# Altium PCB eBox_relay.PcbDoc
Units mm, origin at the board's own origin, x right, y up, seen from the top; angles counter-clockwise.
Board outline 47 x 90 mm, 2 copper layers (Top Layer, Bottom Layer); 51 components, 34 nets, 131 pads, 8 vias.
Unrouted connection lines stored in the file: 88.
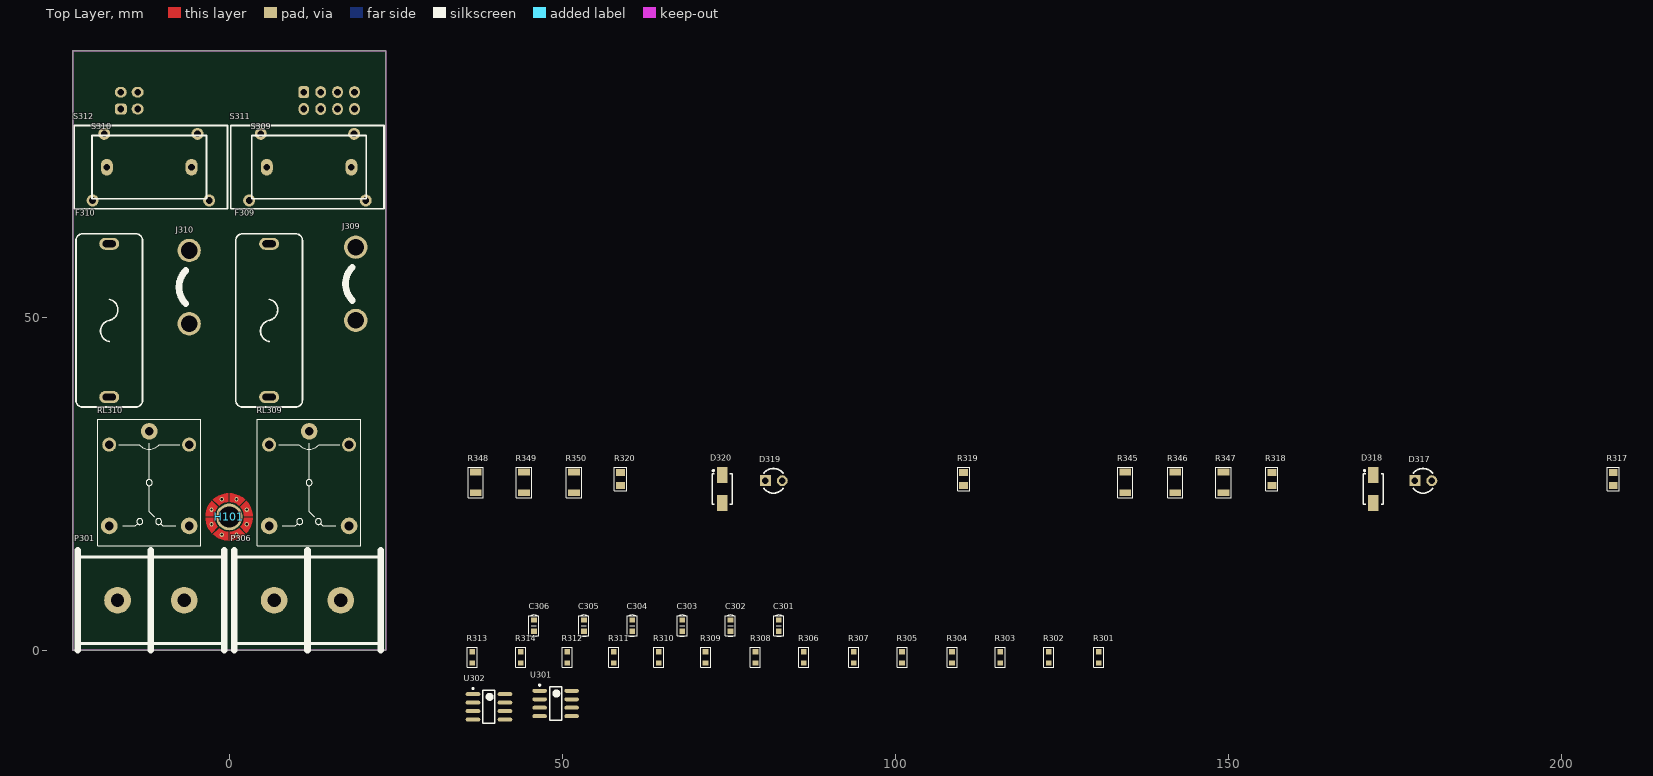
[diagram p0: Top Layer view]
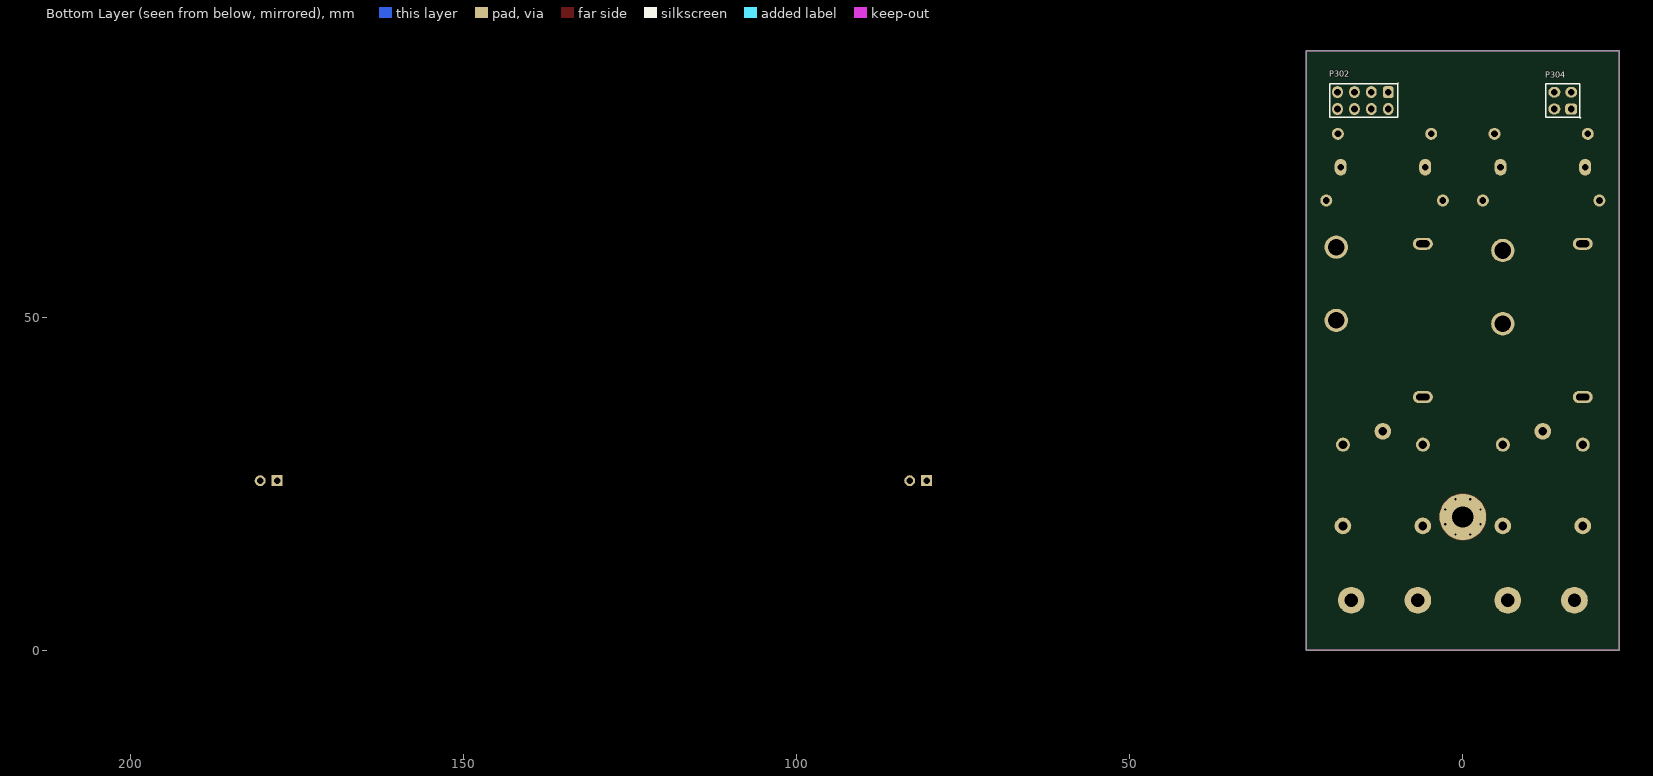
[diagram p1: Bottom Layer view, seen from below]

## Layer stack, top to bottom
Top Solder: solder mask 0.0102, Solder Resist, Dk 3.5
Top Layer: signal copper 0.0356
Dielectric 1: dielectric 0.32, FR-4, Dk 4.8
Bottom Layer: signal copper 0.0356
Bottom Solder: solder mask 0.0102, Solder Resist, Dk 3.5

## Board outline
-23.5,0 23.5,0 23.5,90 -23.5,90

## Design rules (kind name [scope] priority, off if disabled: settings)
Clearance Clearance_3 [InComponent('H*')] p1: gap=0 ignorepadtopadclearanceinfootprint=FALSE
Clearance Clearance_2 [InNet('ACL*') OR InNet('ACN*')] p2: gap=0.35 ignorepadtopadclearanceinfootprint=FALSE except(0: Arc-Hole Track-Hole SMDPad-Hole THPad-Hole Via-Hole Fill-Hole Poly-Hole Region-Hole Text-Hole)
Clearance Clearance_1 [InPolygon] p3: gap=0.5 ignorepadtopadclearanceinfootprint=FALSE except(0: Arc-Hole Track-Hole SMDPad-Hole THPad-Hole Via-Hole Fill-Hole Poly-Hole Region-Hole Text-Hole)
Clearance [All] p4: gap=0.3 ignorepadtopadclearanceinfootprint=FALSE except(0: Arc-Hole Track-Hole SMDPad-Hole THPad-Hole Via-Hole Fill-Hole Poly-Hole Region-Hole Text-Hole)
ComponentClearance ComponentClearance_1 [InComponent('M802') OR  InComponent('P104') OR InComponent('Y202') OR InComponent('C101') OR InComponent('P101') OR InComponent('L101') OR  InComponent('S309') OR InComponent('S310') OR InComponent('H*')] p1: gap=0 collisioncheckmode=3 verticalgap=0 showdistances=FALSE
ComponentClearance [All] p2: gap=0.254 collisioncheckmode=3 verticalgap=0.254 showdistances=FALSE
Height [All] p1: minheight=0 maxheight=30 prefheight=12.7
PolygonConnect PolygonConnect_1 [IsVia] p1: connectstyle=Direct reliefconductorwidth=0.254 reliefentries=4 polygonreliefangle="90 Angle" airgapwidth=0.254
PolygonConnect PolygonConnect_2 [InNet('GND')] p2: connectstyle=Relief reliefconductorwidth=0.3 reliefentries=4 polygonreliefangle="90 Angle" airgapwidth=0.3
PolygonConnect [All] p3: connectstyle=Relief reliefconductorwidth=0.381 reliefentries=4 polygonreliefangle="90 Angle" airgapwidth=0.635
RoutingVias [All] p1: holewidth=0.4 width=0.8 viastyle="Through Hole" minholewidth=0.3 minwidth=0.6 maxholewidth=2 maxwidth=5
SolderMaskExpansion [All] p1: expansion=0.102
Width [All] p1: maxlimit=50 minlimit=0.2 preferedwidth=0.3
28 further rules are at their usual default settings.

## Components (designator, comment, footprint, x,y, rotation, side; value= is the part's Value field where it differs from the comment)
C301 "1uF" "C 0603" 82.5,3.687 r90 top
C302 "100pF" "C 0603" 75.25,3.687 r90 top
C303 "100pF" "C 0603" 68,3.687 r90 top
C304 "1uF" "C 0603" 60.5,3.687 r90 top
C305 "100pF" "C 0603" 53.25,3.687 r90 top
C306 "100pF" "C 0603" 45.75,3.687 r90 top
D317 "Led" "LED 3MM - green" 179.249,25.437 r0 top
D318 "SS14" "DO-214AC (SMA) L" 171.749,24.187 r90 top
D319 "Led" "LED 3MM - green" 81.75,25.437 r0 top
D320 "SS14" "DO-214AC (SMA) L" 74,24.187 r90 top
F309 "Fuse" "FUSE 2 DIP 0520 BOX" 6,49.5 r90 top
F310 "Fuse" "FUSE 2 DIP 0520 BOX" -18,49.5 r90 top
H101 "Screw Hole" SCREW/3.2/7.0/M 0,20 r0 top
J309 "JUMP 2 CUSTOM" JUMP/2/Custom 19,53.5 r270 top
J310 "JUMP 2 CUSTOM" JUMP/2/Custom -6,53 r270 top
P301 "Header 2" HDR/Terminal/2/10mm -11.75,7.5 r180 top
P302 "Header 4X2" HDR/Header/8/DL 15,82.5 r0 bottom
P304 "Header 2X2" HDR/Header/4/DL -15,82.5 r90 bottom
P306 "Header 2" HDR/Terminal/2/10mm 11.75,7.5 r180 top
R301 "1k" "R 0603" 130.499,-1.062 r90 top
R302 "3.9k" "R 0603" 122.999,-1.062 r90 top
R303 "2.2k" "R 0603" 115.749,-1.062 r90 top
R304 "1k" "R 0603" 108.499,-1.062 r90 top
R305 "1k" "R 0603" 101,-1.062 r90 top
R306 "1k" "R 0603" 86.25,-1.062 r90 top
R307 "1k" "R 0603" 93.75,-1.062 r90 top
R308 "1k" "R 0603" 79,-1.062 r90 top
R309 "3.9k" "R 0603" 71.5,-1.062 r90 top
R310 "2.2k" "R 0603" 64.5,-1.062 r90 top
R311 "1k" "R 0603" 57.75,-1.062 r90 top
R312 "1k" "R 0603" 50.75,-1.062 r90 top
R313 "1k" "R 0603" 36.5,-1.062 r90 top
R314 "1k" "R 0603" 43.75,-1.062 r90 top
R317 "4.7K" "R 0805" 207.749,25.687 r90 top
R318 "330R" "R 0805" 156.499,25.687 r90 top
R319 "4.7K" "R 0805" 110.249,25.687 r90 top
R320 "330R" "R 0805" 58.75,25.687 r90 top
R345 "10K" "R 1206" 134.499,25.187 r90 top
R346 "10K" "R 1206" 141.999,25.187 r90 top
R347 "10K" "R 1206" 149.249,25.187 r90 top
R348 "10K" "R 1206" 37,25.187 r90 top
R349 "10K" "R 1206" 44.25,25.187 r90 top
R350 "10K" "R 1206" 51.75,25.187 r90 top
RL309 "SRD-12VDC-SL-C" RL_SPDT_10A 12,25.75 r270 top
RL310 "SRD-12VDC-SL-C" RL_SPDT_10A -12,25.75 r270 top
S309 "TA12-200" TA12 12,72.5 r180 top
S310 "NA" TA12 -12,72.5 r180 top
S311 "TA17" TA17 11.75,72.5 r180 top
S312 "TA17" TA17 -11.75,72.5 r180 top
U301 "LM358" SOIC-8 49,-8 r0 top
U302 "LM358" SOIC-8 39,-8.5 r0 top

## Footprints (in the part's own frame and the unit in brackets; to place one, negate y for a bottom-side part, rotate by r counter-clockwise, add the part's x,y. Pads: shape width x height; smd on the part's side, far side on the other; paste and mask are expansions set on the pad)
"C 0603" [mm] "Chip Capacitor, 2-Leads, Body 1.6x0.8mm, IPC Medium Density"
  rect 0.8x0.85 smd: 1(-0.85,0) 2(0.85,0)
  silkscreen extent -1.6,-0.75 1.6,0.75, body extent -0.8,-0.43 0.8,0.43, height 0.81
"DO-214AC (SMA) L" [mm] "Molded Diode, 2-Leads, Body 4.3x2.7mm, IPC Medium Density"
  rect 2.35x1.55 smd: 1(-2.1,0) 2(2.1,0)
  silkscreen extent -2.3,-1.5 2.89,1.5, body extent -2.6,-1.3 2.6,1.3, height 2.4
"FUSE 2 DIP 0520 BOX" [mm] "5mm x 20mm"
  oval 1.8x3 hole 1 slot 2 at 90 deg: 1(-11.5,0) 2(11.5,0)
  silkscreen extent -13,-5 13,5, body extent -12.15,-4.8 12.15,4.8, height 10.75
HDR/Header/4/DL [mm]
  rrect50% 1.6x1.8 hole 1: 1(-1.27,-1.27)
  oval 1.6x1.8 hole 1: 2(-1.27,1.27) 3(1.27,-1.27) 4(1.27,1.27)
  silkscreen extent -2.67,-2.67 2.54,2.54, body extent -2.54,-2.54 2.54,2.54, height 8.89
HDR/Header/8/DL [mm]
  rrect50% 1.6x1.8 hole 1: 1(-3.81,-1.27)
  oval 1.6x1.8 hole 1: 2(-3.81,1.27) 3(-1.27,-1.27) 4(-1.27,1.27) 5(1.27,-1.27) 6(1.27,1.27) 7(3.81,-1.27) 8(3.81,1.27)
  silkscreen extent -5.33,-2.67 4.95,2.54, body extent -5.08,-2.54 5.08,2.54, height 8.89
HDR/Terminal/2/10mm [mm]
  round 4 hole 2: 1(-5,0) 2(5,0)
  silkscreen extent -11,-7.5 11,7.5, body extent -11,-7.75 11,7.75, height 18.14
JUMP/2/Custom [mm]
  round 3.5 hole 2.5: 1(-7,0) 2(4,0)
  silkscreen extent -4,-1.53 1,-0.5
"LED 3MM - green" [mil]
  rect 65x65 hole 39: 1(-50,0)
  round 65 hole 39: 2(50,0)
  silkscreen extent -60,-73 55,72, body extent -66,-65 64,65, height 207
"R 0603" [mm] "Chip Resistor, 2-Leads, Body 1.6x0.8mm, IPC Medium Density"
  rect 0.8x0.85 smd: 1(-0.85,0) 2(0.85,0)
  silkscreen extent -1.5,-0.75 1.5,0.75, body extent -0.8,-0.4 0.8,0.4, height 0.5
"R 0805" [mm] "Chip Resistor, 2-Leads, Body 2.0x1.3mm, IPC Medium Density"
  rect 1.05x1.35 smd: 1(-0.975,0) 2(0.975,0)
  silkscreen extent -1.75,-0.92 1.75,0.92, body extent -1,-0.61 1,0.59, height 0.5
"R 1206" [mm] "Chip Resistor, 2-Leads, Body 3.1x1.6mm, IPC Medium Density"
  rect 1x1.75 smd: 1(-1.55,0) 2(1.55,0)
  silkscreen extent -2.29,-1.14 2.29,1.14, body extent -1.6,-0.8 1.6,0.8, height 0.6
RL_SPDT_10A [mm] "Relay SPDT, 5 pin, 10A,W 650mil, L 800mil, H 800mil"
  round 2.5 hole 1.3: 1(-7.1,0) 2(7.1,-6) 3(7.1,6)
  round 2.1 hole 1.3: 4(-5.1,-6) 5(-5.1,6)
  silkscreen extent -8.9,-7.75 10.1,7.75, body extent -8.9,-7.75 10.1,7.75, height 15.4
SCREW/3.2/7.0/M [mm]
  round 4 / inner round 7 / far side round 7 hole 3.2: 1(0,0)
  Top Layer region: -2.25,0.1 -2.225,0.325 -2.175,0.575 -2.1,0.8 -2.025,0.975 -1.95,1.125 -1.875,1.25 -1.775,1.375 -1.675,1.5 -2.6,2.425 -2.775,2.225 -2.925,2.025 -3.05,1.825 -3.175,1.6 -3.275,1.375 -3.35,1.175 -3.425,0.95 -3.475,0.725 -3.5,0.6 -3.525,0.45 -3.55,0.1
  Top Layer region: -2.25,-0.1 -2.225,-0.325 -2.175,-0.575 -2.1,-0.8 -2.025,-0.975 -1.95,-1.125 -1.875,-1.25 -1.775,-1.375 -1.675,-1.5 -2.6,-2.425 -2.775,-2.225 -2.925,-2.025 -3.05,-1.825 -3.175,-1.6 -3.275,-1.375 -3.35,-1.175 -3.425,-0.95 -3.475,-0.725 -3.5,-0.6 -3.525,-0.45 -3.55,-0.1
  Top Layer region: -0.1,2.25 -0.325,2.225 -0.575,2.175 -0.8,2.1 -0.975,2.025 -1.125,1.95 -1.25,1.875 -1.375,1.775 -1.5,1.675 -2.425,2.6 -2.225,2.775 -2.025,2.925 -1.825,3.05 -1.6,3.175 -1.375,3.275 -1.175,3.35 -0.95,3.425 -0.725,3.475 -0.6,3.5 -0.45,3.525 -0.1,3.55
  Top Layer region: 0.1,2.25 0.325,2.225 0.575,2.175 0.8,2.1 0.975,2.025 1.125,1.95 1.25,1.875 1.375,1.775 1.5,1.675 2.425,2.6 2.225,2.775 2.025,2.925 1.825,3.05 1.6,3.175 1.375,3.275 1.175,3.35 0.95,3.425 0.725,3.475 0.6,3.5 0.45,3.525 0.1,3.55
  Top Layer region: 2.25,-0.1 2.225,-0.325 2.175,-0.575 2.1,-0.8 2.025,-0.975 1.95,-1.125 1.875,-1.25 1.775,-1.375 1.675,-1.5 2.6,-2.425 2.775,-2.225 2.925,-2.025 3.05,-1.825 3.175,-1.6 3.275,-1.375 3.35,-1.175 3.425,-0.95 3.475,-0.725 3.5,-0.6 3.525,-0.45 3.55,-0.1
  Top Layer region: 2.25,0.1 2.225,0.325 2.175,0.575 2.1,0.8 2.025,0.975 1.95,1.125 1.875,1.25 1.775,1.375 1.675,1.5 2.6,2.425 2.775,2.225 2.925,2.025 3.05,1.825 3.175,1.6 3.275,1.375 3.35,1.175 3.425,0.95 3.475,0.725 3.5,0.6 3.525,0.45 3.55,0.1
  Top Layer region: 0.1,-2.25 0.325,-2.225 0.575,-2.175 0.8,-2.1 0.975,-2.025 1.125,-1.95 1.25,-1.875 1.375,-1.775 1.5,-1.675 2.425,-2.6 2.225,-2.775 2.025,-2.925 1.825,-3.05 1.6,-3.175 1.375,-3.275 1.175,-3.35 0.95,-3.425 0.725,-3.475 0.6,-3.5 0.45,-3.525 0.1,-3.55
  Top Layer region: -0.1,-2.25 -0.325,-2.225 -0.575,-2.175 -0.8,-2.1 -0.975,-2.025 -1.125,-1.95 -1.25,-1.875 -1.375,-1.775 -1.5,-1.675 -2.425,-2.6 -2.225,-2.775 -2.025,-2.925 -1.825,-3.05 -1.6,-3.175 -1.375,-3.275 -1.175,-3.35 -0.95,-3.425 -0.725,-3.475 -0.6,-3.5 -0.45,-3.525 -0.1,-3.55
  Top Layer pour cut-out: -4,0 -3.696,1.531 -2.828,2.828 -1.531,3.695 0,4 0,4 1.531,3.695 2.828,2.828 3.695,1.531 4,0 4,0 3.696,-1.531 2.828,-2.828 1.531,-3.696 0,-4 0,-4 -1.531,-3.696 -2.828,-2.828 -3.696,-1.531 -4,0
  Bottom Layer pour cut-out: -4,0 -3.696,1.531 -2.828,2.828 -1.531,3.695 0,4 0,4 1.531,3.695 2.828,2.828 3.695,1.531 4,0 4,0 3.696,-1.531 2.828,-2.828 1.531,-3.696 0,-4 0,-4 -1.531,-3.696 -2.828,-2.828 -3.696,-1.531 -4,0
SOIC-8 [mm] "SOIC, 8-Leads, Body 5.0x4.0mm (max), Pitch 1.27mm, IPC Medium Density"
  oval 2.2x0.6 smd: 1(-2.4,1.905) 2(-2.4,0.635) 3(-2.4,-0.635) 4(-2.4,-1.905) 5(2.4,-1.905) 6(2.4,-0.635) 7(2.4,0.635) 8(2.4,1.905)
  silkscreen extent -2.52,-2.5 0.9,2.88, body extent -3,-2.49 3,2.41, height 1.75
TA12 [mm]
  oval 1.8x2.5 hole 1: 1(-6.35,0) 2(6.35,0)
  silkscreen extent -8.6,-4.75 8.6,4.75, body extent -8.6,-4.75 8.6,4.75, height 20.4
TA17 [mm]
  round 1.8 hole 1: 1(-7,-5) 2(7,-5) 3(8.75,5) 4(-8.75,5)
  silkscreen extent -11.5,-6.25 11.5,6.25, body extent -11.5,-6.25 11.5,6.25, height 26

## Part data
C301 C302 C303 C304 C305 C306: library part "Capacitor NP", "Capacitor non-pol"
D317 D319: "LED RED CLEAR 0805 SMD", PACKAGE=SMD0805, STOCK CODE=HT17-2102SURC, STOCK DESC="SMD-0805 High Bright Red Chip LED", SUPPLIER=tme.vn, TYPE=SMD, UNIT PRICE=800
D318 D320: library part Diode, "DIODE SCHOTTKY 40V 1A SMA", PACKAGE=DO-214AC, BRAND=Toshiba, PART NO=SS14, STOCK CODE=SS14, STOCK DESC="1A 40V Schottky Barrier Diode", SUPPLIER=tme.vn, TYPE=SMD, UNIT PRICE=1000
P301 P306: "Header, 2-Pin", UNIT PRICE=0
P302: "Header, 4-Pin, Dual row"
P304: "Header, 2-Pin, Dual row"
R301 R302 R303 R304 R305 R306 R307 R308 R309 R310 R311 R312 R313 R314: library part Resistor, "Resistor"
R317 R319: library part Resistor, "RES SMD 4.7K OHM 1% 1/10W 0805", PACKAGE=SMD0805, STOCK CODE=RM10JTN472, STOCK DESC="4.7K 5% SMD-0805 Resistor", SUPPLIER=tme.vn, TYPE=SMD, UNIT PRICE=60
R318 R320: library part Resistor, "RES SMD 680 OHM 1% 1/10W 0805", PACKAGE=SMD0805, STOCK CODE=RM10JTN681, STOCK DESC="680R 5% SMD-0805 Resistor", SUPPLIER=tme.vn, TYPE=SMD, UNIT PRICE=60
R345 R346 R347 R348 R349 R350: library part Resistor, "RES SMD 10K OHM 5% 1/4W 1206", PACKAGE=SMD1206, STOCK DESC="RES SMD 10K OHM 5% 1/4W 1206", SUPPLIER=banlinhkien.com, TYPE=SMD, UNIT PRICE=240
RL309 RL310: library part "Relay SPDT", "RELAY GEN PURPOSE SPDT 10A 12V", BRAND=SONGLE, PART NO=SRD-12VDC-SL-C, STOCK CODE=SRD-12VDC-SL-C, STOCK DESC="Relay SRD-12VDC-SL-C", SUPPLIER=tme.vn, TYPE=TH, UNIT PRICE=10000
S309: library part TA12, "CURR SENSE 1:2000 5A T/H", BRAND=YHDC, PART NO=TA12-200, SUPPLIER=CHINA, TYPE=TH, UNIT PRICE=22328
S310: library part TA12, "CURR SENSE 1:2000 5A T/H", PART NO=TA12-200, BRAND=YHDC, SUPPLIER=CHINA, TYPE=TH, UNIT PRICE=22328
U301 U302: "Low Power Dual Operational Amplifiers"
F309 F310: UNIT PRICE=0
H101 J309 J310: TYPE=NO-BOM, UNIT PRICE=0

## Via types
v1: diameter 0.66, hole 0.33, Top Layer to Bottom Layer, tented both sides, 8 vias

## Nets (pads, with @x,y where several pads share a name; then routed paths per layer and width w, separated by ;. In a path a pad name is that pad's centre, name@x,y a point inside that pad or via, vN(x,y) a via of type N, cw(c..) or ccw(c..) an arc to the next point about the centre after c; other vN are vias at no path point)
5V: P302.5 R302.2 R309.2
12V: D318.2 D320.2 P302.6 R317.1 R319.1 RL309.5 RL310.5
ACL: J309.2 J310.2 P301.1
ACL18: P304.4 P306.2 RL309.2
ACL19: P304.3 P306.1 RL310.2
ACL28: F309.1 R345.1 RL309.4
ACL29: F310.1 R348.1 RL310.4
ACN: P301.2 R347.2 R350.2
ADC_OUT8: C303.2 P302.2 R306.1 U301.1
ADC_OUT9: C306.2 P302.1 R313.1 U302.1
CT_OUT8: R304.2 R318.1 S309.2 S311.2
CT_OUT9: R311.2 R320.1 S310.2 S312.2
GND: C301.2 C302.2 C304.2 C305.2 P302.7 P302.8 R303.1 R305.1 R307.2 R310.1 R312.1 R314.2 U301.4 U302.4
NetC301_1: C301.1 R302.1 R303.2 U301.5
NetC302_1: C302.1 R304.1 R305.2 U301.3
NetC303_1: C303.1 R306.2 R307.1 U301.2
NetC304_1: C304.1 R309.1 R310.2 U302.5
NetC305_1: C305.1 R311.1 R312.2 U302.3
NetC306_1: C306.1 R313.2 R314.1 U302.2
NetD317_1: D317.1 R317.2
NetD319_1: D319.1 R319.2
NetF309_2: F309.2 J309.1
NetF310_2: F310.2 J310.1
NetR301_2: R301.2 U301.6 U301.7
NetR308_2: R308.2 U302.6 U302.7
NetR345_2: R345.2 R346.1
NetR346_2: R346.2 R347.1
NetR348_2: R348.2 R349.1
NetR349_2: R349.2 R350.1
RL_8: D317.2 D318.1 P302.4 RL309.1
RL_9: D319.2 D320.1 P302.3 RL310.1
V_REF8: R301.1 R318.2 S309.1 S311.1
V_REF9: R308.1 R320.2 S310.1 S312.1
VCC: U301.8 U302.8
pads on no net: H101.1 P304.1 P304.2 RL309.3 RL310.3 S311.3 S311.4 S312.3 S312.4
copper on no net:
  other v1: -1.1,17.35 1.1,17.35 -2.65,18.9 2.65,18.9 -2.65,21.1 2.65,21.1 -1.1,22.65 1.1,22.65

## Keep-outs
Keep-Out Layer:
  the board outline again, w0.2

## Dimensions
23.5,0 to 23.5,90 on Top Overlay
-23.5,0 to 23.5,0 on Top Overlay